# Altium PCB TX_custom.PcbDoc (part 2 of 2)
Units mil, origin at the board's own origin, x right, y up, seen from the top; angles counter-clockwise.
Board outline 2165.35 x 2559.06 mil, 4 copper layers (Top Layer, Signal Layer 1, Internal Plane 1, Bottom Layer), stack 60.752 mil thick; 202 components, 136 nets, 640 pads, 248 vias.
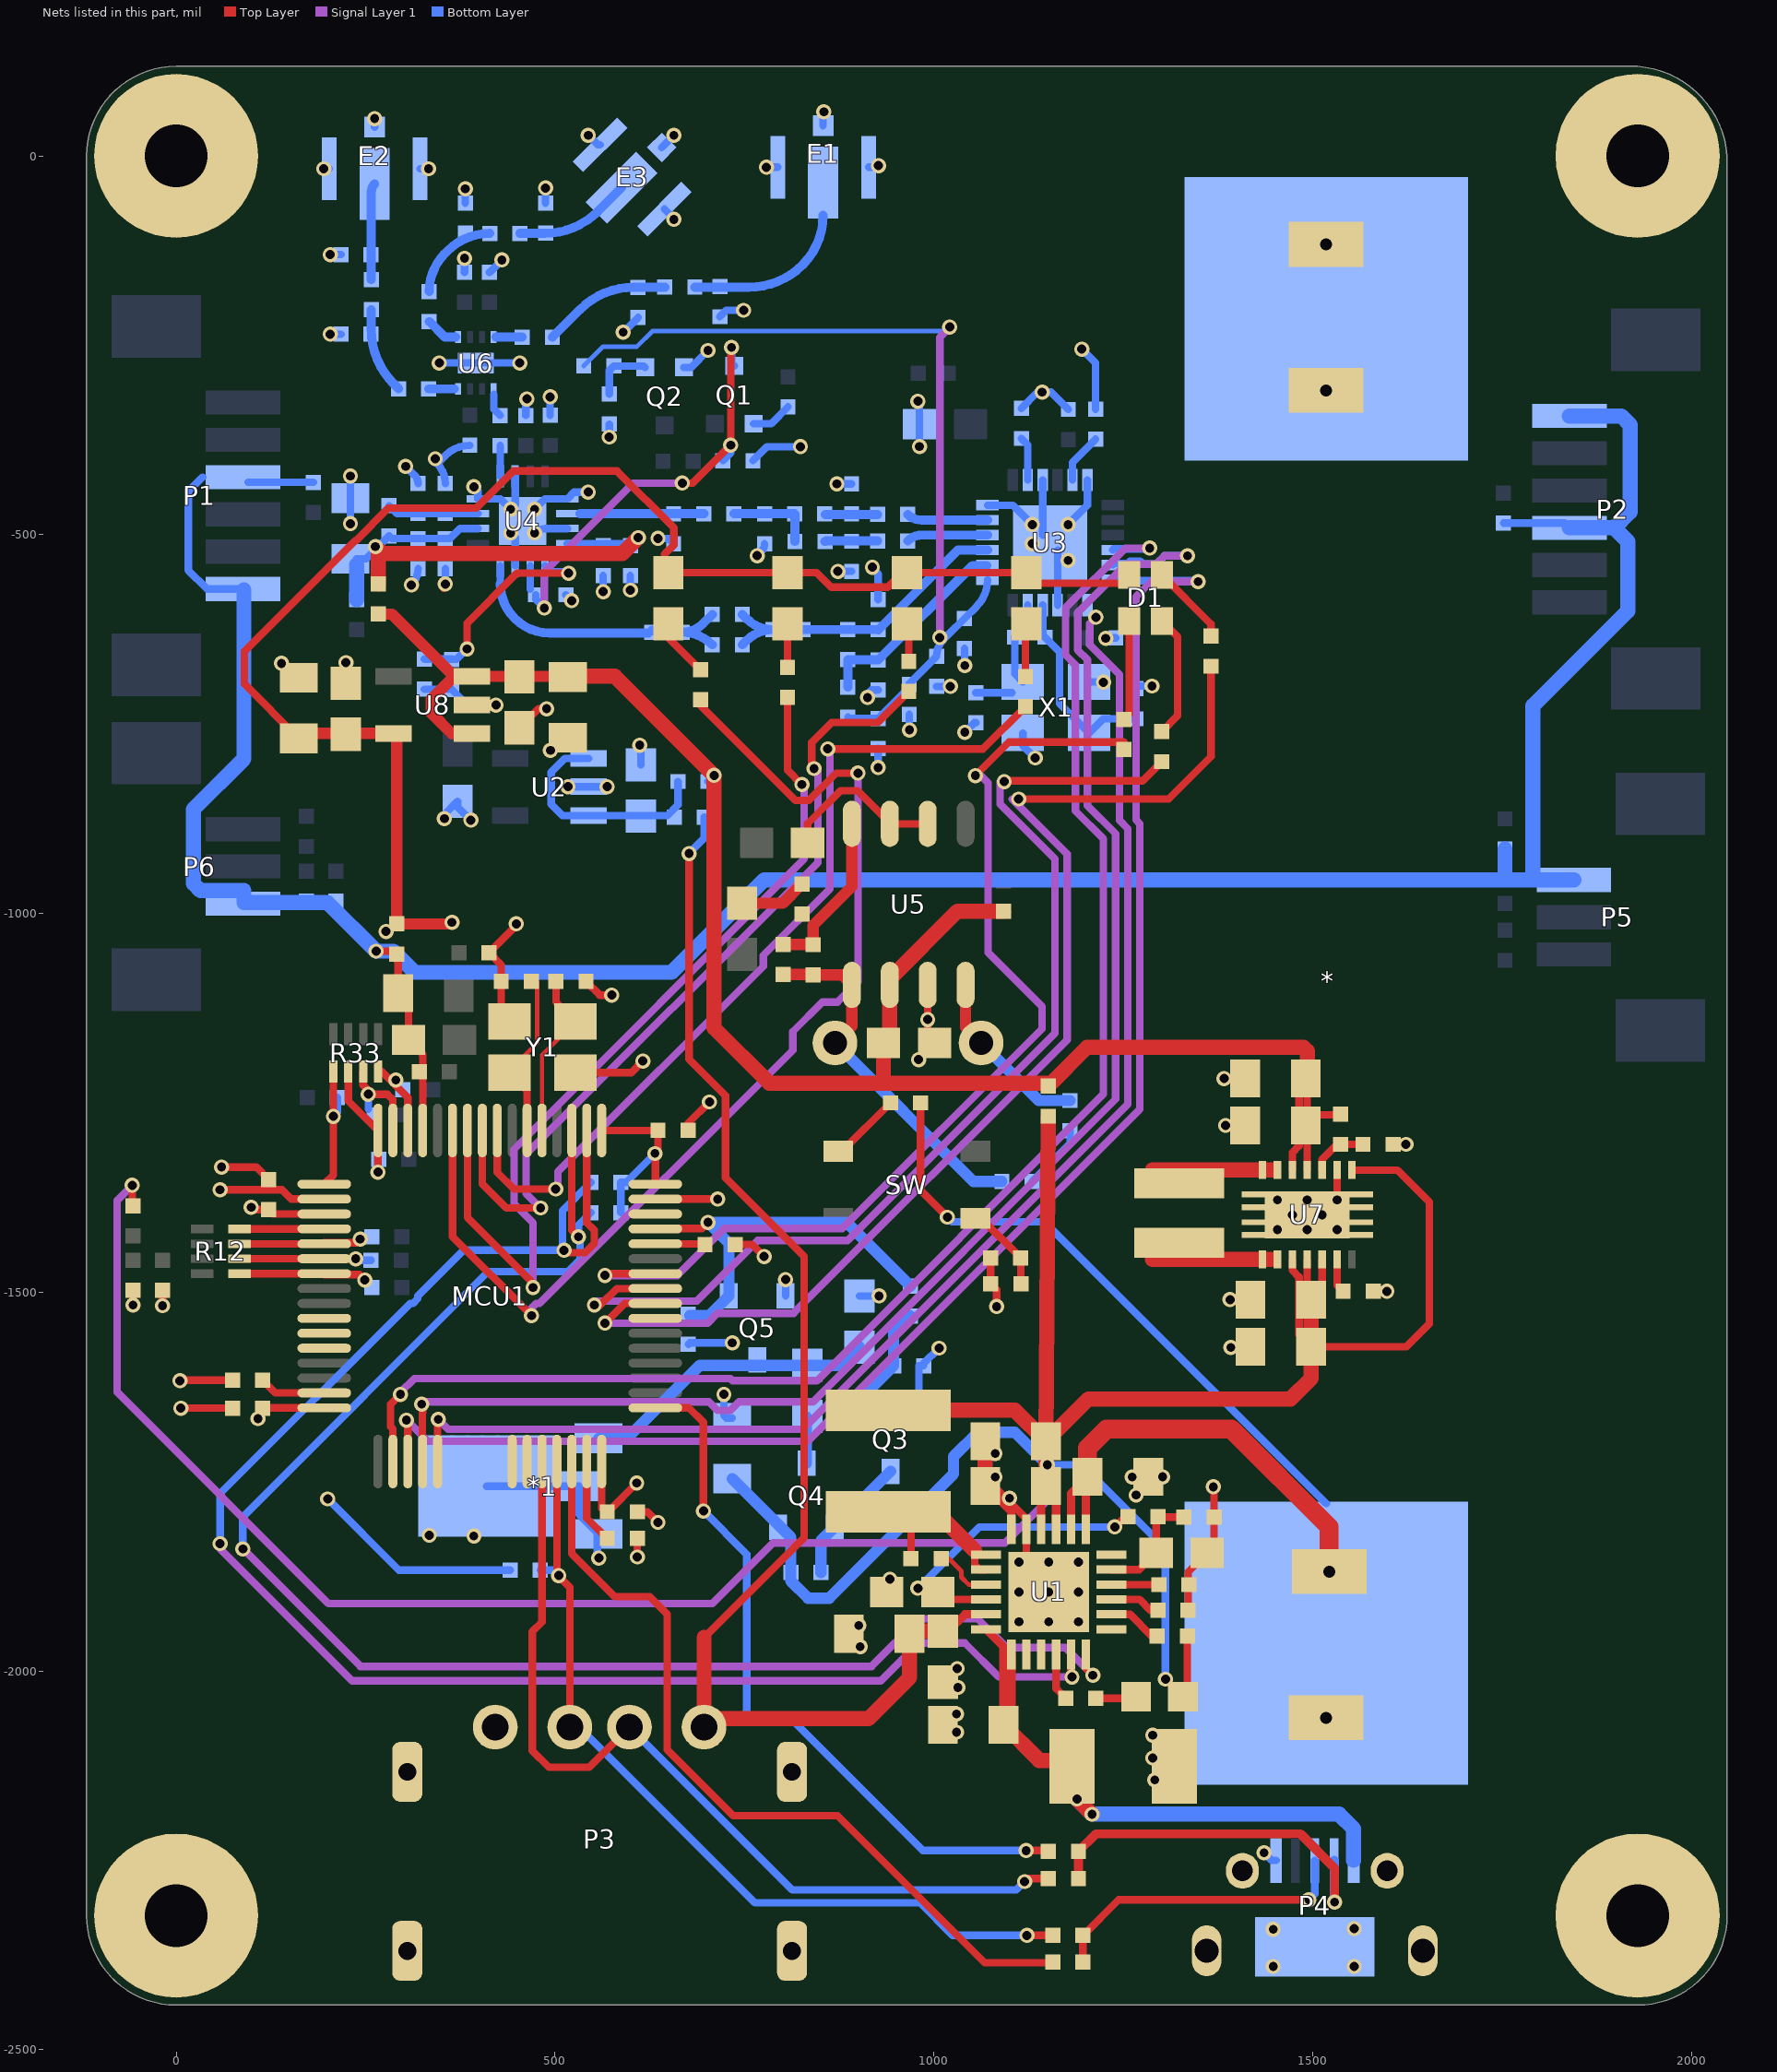
[diagram p4: the nets of this part, all layers, seen from the top]

## Via types
v1: diameter 20, hole 12, Top Layer to Bottom Layer, 207 vias
v2: diameter 19.68, hole 11.81, Top Layer to Bottom Layer, 28 vias
v3: diameter 20/20/20 (per signal layer), hole 12, Top Layer to Bottom Layer, 13 vias

## Nets (pads, with @x,y where several pads share a name; then routed paths per layer and width w, separated by ;. In a path a pad name is that pad's centre, name@x,y a point inside that pad or via, vN(x,y) a via of type N, cw(c..) or ccw(c..) an arc to the next point about the centre after c; other vN are vias at no path point) (continued)
GND: *1.0 *1.2 *.2 C1.2 C2.2 C3.1 C4.2 C6.2 C7.1 C8.2 C9.2 C12.1 C13.2 C14.2 C15.2 C16.1 C17.1 C18.2 C19.2 C20.2 C21.2 C22.1 C23.1 C24.1 C25.1 C26.1 C27.1 C28.1 C29.1 C30.1 C31.2 C32.1 C33.2 C34.1 C35.2 C36.2 C37.2 C38.1 C39.1 C41.2 C42.1 C43.2 C44.1 C47.2 C49.1 C52.2 C53.1 C61.1 C62.2 C63.2 C64.2 C65.2 C66.2 C67.1 C68.1 C69.1 C70.1 C75.2 C78.2 C81.2 C82.2 C84.2 C86.2 C87.2 C88.2 C89.2 C92.2 E1.2 E2.2 E3.2 L3.1 MCU1.18 MCU1.63 P3.0 P3.4 P4.5 pad.0 pad.1 pad.2 pad.3 Q2.2 Q3.2 Q5.2 R1.2 R2.2 R6.1 R7.2 R8.2 R10.1 R11.1 R16.1 R28.1 R29.1 R32.2 R34.2 R42.1 R44.1 R46.1 R54.2 R55.2 R56.1 U1.0 U1.17 U1.18 U2.2 U3.0 U3.9 U3.18 U3.21 U3.24 U4.0 U4.1 U4.3 U4.7 U4.12 U4.14 U5.7 U6.0 U7.0 U7.2 U8.2 X1.2 X1.4 Y1.2 Y1.4 | length 4649.7
  Top Layer w10: v1(-57,-1516.83) C61.1@-57,-1497.69 ; v1(-18,-1517.83) R46.1@-18,-1497.69 ; v1(5,-1616.83) 5.83,-1616 R28.1@74.31,-1616 ; v1(6.17,-1653) C67.1@74.31,-1653 ; v1(58,-1364.83) 140,-1364.83 152.21,-1377.05 MCU1.18@195.5,-1377.05 ; v1(60,-1334.83) 105.68,-1334.83 C69.1@122,-1351.15 ; v1(139,-669.83) 158.17,-689 C84.2@162,-689 ; C65.2@224,-696 v1(224,-668.83) ; v1@228,-417.83 cw(c223.17,-422.66) v1(230,-422.66) ; v1(230,-485.42) ccw(c233.41,-485.42) v1@231,-487.83 ; v1@346,-272.83 ccw(c347.31,-271.52) v1(347.31,-273.38) ; v1@353,-570.83 ccw(c347.33,-565.16) v1(355.35,-565.16) ; U8.2@390.19,-725 v1(422.17,-725) ; Y1.4@429,-1132.14 C63.2@429,-1089.83 429,-1067.83 R34.2@413,-1051.83 449,-1015.83 v1(449,-1013.83) ; C82.2@453,-755 478.17,-729.83 v1(489,-729.83) ; v1(453.48,-273.38) cw(c453.48,-278.35) v1@457,-274.83 ; v1(494,-784.83) 510.83,-768 C81.2@517,-768 ; Y1.2@527,-1210.3 600.54,-1210.3 v1(616,-1194.83) ; C62.2@541,-1089.83 559,-1107.83 v1(575,-1107.83) ; v1(608.68,-1849.52) R29.1@608.68,-1824.83 ; C68.1@608.68,-1789.83 622,-1789.83 v1(636,-1803.83) ; MCU1.63@632.5,-1377.05 v1(714.79,-1377.05) ; C70.1@675.68,-1286 675.68,-1277.15 v1(704,-1248.83) ; R16.1@737.68,-1437 760.17,-1437 v1(776,-1452.83) ; v1@870,-549.83 cw(c873.4,-553.24) v1(873.4,-548.43) ; v1@870,-433.83 cw(c872.13,-435.96) v1(872.13,-432.95) ; v1@910.49,-712.83 v1(912.62,-714.97) ; v1(980,-1193) 980,-1192 C75.2@1001,-1171 ; C75.2@992,-1162 v1(992,-1140) U5.7@992,-1094.3 ; v1(1021.9,-700.38) cw(c1021.9,-701.94) v1@1023,-700.83 ; C35.2@1075,-1454.67 1075,-1488.52 R56.1@1075.31,-1488.83 1083,-1496.52 v1(1083,-1519) ; U1.18@1102.45,-1813.05 1102.45,-1790.29 C2.2@1068,-1755.83 1079,-1755.83 1122.14,-1798.97 U1.17@1122.14,-1813.05 U1.0@1122.14,-1866.19 ; v1(1224,-694.83) v1@1225,-695.83 ; C15.2@1283,-1743.83 v1(1302,-1743.83) ; R6.1@1335.68,-1920 1335.68,-1869.32 R8.2@1361,-1844 1370,-1835 R7.2@1370,-1797 1370,-1757.83 v1(1369,-1756.83) ; v1(1383.17,-1217.83) C89.2@1411,-1217.83 ; v1(1385.17,-1279.83) C86.2@1411,-1279.83 ; v1(1391.17,-1509.83) C88.2@1418,-1509.83 ; v1(1392.17,-1572.83) 1393.17,-1571.83 C87.2@1418,-1571.83 ; v1(1532.37,-1378.15) U7.2@1532.37,-1338.78 ; R55.2@1580,-1498.83 v1(1598.17,-1498.83) ; R54.2@1606.17,-1304.83 v1(1623.17,-1304.83)
  Top Layer w20: C2.2@1068,-1755.83 C4.2@1068,-1696.83
  Bottom Layer w10: v1(194.83,-17) E2.2@202,-17 ; v1(203.46,-235.38) C33.2@217.62,-235.38 ; v1(203.46,-130.38) C64.2@217.62,-130.38 ; v1(230,-485.42) C23.1@230,-451.83 v1(230,-422.66) ; E2.2@262,38 v1(262,49.17) ; v1(303,-409.83) 314.86,-421.7 cw(c304.04,-432.53) C24.1@319.35,-432.53 ; v1(310.45,-566.39) ccw(c288.96,-544.9) C26.1@319.35,-544.9 ; E2.2@322,-17 v1(333.17,-17) ; C30.1@327.62,-704.06 363.31,-704.06 R32.2@363.62,-704.38 384.24,-725 v1(422.17,-725) ; v1(342,-399.83) 342,-403.83 v1@344.5,-406.34 ; v1(347.31,-273.38) U6.0@395.62,-273.38 v1(453.48,-273.38) ; v1(354,-874.83) 354,-869.38 C34.1@371.46,-851.92 371.46,-859.29 v1(389,-876.83) ; v1(355.35,-565.16) C27.1@355.35,-544.9 ; C25.1@355.35,-432.53 ccw(c318.31,-432.53) v1@344.5,-406.34 ; C32.1@380.62,-153.69 v1(380.62,-135.21) ; C66.2@381.62,-62.38 v1(381.62,-43.46) ; C38.1@387.62,-382.06 ccw(c387.62,-427.57) 355.45,-395.39 v1@344.5,-406.34 ; v1(393,-436.83) 398.31,-442.15 U4.12@398.31,-452.6 427.84,-452.6 v2(441.62,-466.38) 447.53,-460.47 U4.14@447.53,-423.07 ; *1.0@409.89,-1756 *1.0@531.94,-1756 531.94,-1793.4 *1.2@557.53,-1818.99 556,-1820.52 556,-1848.83 v1(558,-1850.83) ; C44.1@413.62,-153.69 v1(430,-137.32) ; v2(441.62,-497.87) 447.53,-503.78 U4.7@447.53,-541.18 ; C22.1@461.65,-342.77 461.65,-322.18 v1(463,-320.83) ; v2(473.12,-497.87) cw(c487.38,-512.13) 487.38,-491.97 U4.3@516.43,-491.97 ; v2(473.12,-466.38) 486.9,-452.6 U4.1@516.43,-452.6 525.19,-443.83 v1(544,-443.83) ; C92.2@487.62,-62.38 v1(487.62,-42.46) ; C52.2@493.65,-342.46 v1(493.65,-318.18) ; C53.1@514.31,-579.38 v1(522,-587.07) ; v1(517.1,-832.74) U2.2@544.31,-832.74 v1(568.9,-832.74) ; v1(544,27.17) 556.57,14.59 E3.2@559.57,14.59 ; v1(563.59,-575.24) C28.1@563.59,-553.98 ; v1(571.62,-371.21) R10.1@571.62,-354.06 ; v1(590,-232.83) 590.17,-232.83 C43.2@609.62,-213.38 ; v1(599.59,-573.24) C29.1@599.59,-553.98 ; v1(612,-777.83) 613.46,-779.29 C42.1@613.46,-803.99 ; v1(636,-505) 649.56,-505 C7.1@656.62,-512.06 ; E3.2@640.89,11.06 v1(657,27.17) ; E3.2@644.43,-70.26 657,-82.83 v1(657,-83.83) ; Q2.2@670.21,-279.19 679.65,-279.19 v1(702,-256.83) ; R44.1@676,-1568.69 677.85,-1566.83 v1(734,-1566.83) ; C41.2@717.62,-212.38 726.17,-203.83 v1(749,-203.83) ; v1(723,-1634.83) 723,-1662.83 726.17,-1666 C78.2@734,-1666 ; R11.1@761.31,-402.38 779.85,-383.83 v1(824,-383.83) ; v1(767,-527.83) 772.27,-522.56 ccw(c761.78,-512.06) C49.1@776.62,-512.06 ; v1(779.17,-15) E1.2@794,-15 ; Q5.2@804.4,-1504.68 v1(804.4,-1483.24) ; E1.2@854,40 854,57.17 v1(855,58.17) ; v1(872.13,-432.95) C47.2@891.54,-432.95 ; v1(873.4,-548.43) L3.1@891.54,-548.43 ; C37.2@902,-1505 v1(927.83,-1505) ; v1(912.62,-714.97) 912.62,-710.21 917.77,-705.06 C16.1@926.62,-705.06 ; E1.2@914,-15 924.83,-15 v1(927,-12.83) ; v1(919,-543) 919,-544.59 926.62,-552.21 C12.1@926.62,-585.69 ; v1(926.62,-807.46) C21.2@926.62,-782.38 ; C19.2@967.62,-737.38 967.62,-757.46 v1(968,-757.83) ; v1(979,-323.83) 981.16,-325.99 C39.1@981.16,-354.38 v1(981.16,-383.68) ; Q3.2@980.4,-1651.68 R42.1@980.4,-1597 ; R42.1@986.68,-1597 986.68,-1594.15 v1(1007,-1573.83) ; C18.2@1003.62,-700.38 v1(1021.9,-700.38) ; C20.2@1040.62,-650.38 1040.62,-672.46 v1(1041,-672.83) ; v1(1041,-760.83) 1053.46,-748.38 C9.2@1055.62,-748.38 ; U3.18@1070.94,-461.18 1104.41,-461.17 v3(1130,-486.77) ; R1.2@1115.62,-333.38 1137.17,-311.83 v1(1143,-311.83) 1154.76,-311.83 C3.1@1177.62,-334.69 ; X1.2@1117.62,-761.84 1117.62,-778.46 v1(1134,-794.83) ; U3.0@1143.78,-500.54 U3.21@1143.78,-427.72 ; U3.9@1163.46,-593.07 U3.0@1163.46,-520.22 ; v3(1177.24,-486.77) 1202.83,-461.17 U3.24@1202.83,-427.72 ; v1(1195.35,-255.04) 1213.62,-273.31 C36.2@1213.62,-334.38 ; X1.4@1204.93,-694.38 1223.54,-694.38 v1(1224,-694.83) ; v1(1227,-636.83) 1226.54,-636.38 C17.1@1240.31,-636.38 ; C8.2@1266.62,-703.38 1270.17,-699.83 v1(1288,-699.83) ; v1(1436,-2240) 1446,-2250 P4.5@1451.82,-2250
  other v1: 1291.68,-2143.83 1453.63,-1417.52 1493,-1417.52 1532.37,-1417.52 1473.31,-1397.83 1512.68,-1397.83 1453.63,-1378.15 1493,-1378.15
  other v2: 1448,-2390 1555,-2390 1448,-2341 1555,-2340 1289,-2114.83 1289,-2084.83 1030,-2080.83 1030,-2056.83 1032,-2021.83 1031,-1996.83 903,-1967.83 901,-1939.83 942,-1878.83 393,-1821.83 334,-1820.83 1100,-1771.83 1267,-1767.83 1081,-1743.83 1262,-1743.83 1081,-1712.83
  other v3: 1112.3,-1935.09 1151.67,-1935.09 1191.04,-1935.09 1112.3,-1895.72 1151.67,-1895.72 1191.04,-1895.72 1112.3,-1856.35 1151.67,-1856.35 1191.04,-1856.35 1177.24,-534.02 1130,-512
IRQ: MCU1.37 U3.7 | length 1819.5
  Top Layer w10: MCU1.37@345.1,-1723.5 v1@345.1,-1668.73
  Signal Layer 1 w10: v1(346,-1667.83) 359,-1680.83 826.95,-1680.83 1256,-1251.79 1256,-888.23 1245,-877.23 1245,-684.53 1206,-645.53 1206,-617 v1(1214,-609)
  Bottom Layer w10: v1(1214,-609) v1@1218.78,-609
KEY1: MCU1.26
KEY2: MCU1.27
KEY3: MCU1.28
MISO: MCU1.35 U3.6 | length 2099.2
  Top Layer w10: v1(304,-1668.83) 305.73,-1670.57 MCU1.35@305.73,-1723.5
  Signal Layer 1 w10: v1(304,-1668.83) 332,-1696.83 833.58,-1696.83 1272,-1258.42 1272,-881.61 1267,-876.61 1267,-581.83 1286.83,-562 v1(1349,-562)
  Bottom Layer w10: U3.6@1236.3,-559.61 1237.54,-560.83 1347.83,-560.83 v1(1349,-562)
MOSI: MCU1.36 U3.5 | length 2114.2
  Top Layer w10: v1(324,-1647.83) 325.42,-1649.25 325.42,-1658.72 325,-1659.14 325,-1723.09 MCU1.36@325.42,-1723.5
  Signal Layer 1 w10: v1(324,-1647.83) 327,-1644.83 703.3,-1644.83 714.3,-1655.83 731.7,-1655.83 742.7,-1644.83 840.33,-1644.83 1240,-1245.16 1240,-894.86 1203,-857.86 1203,-665.16 1190,-652.16 1190,-603.3 1254.47,-538.83 1293.7,-538.83 1304.53,-528 v1(1335,-528)
  Bottom Layer w10: U3.5@1236.3,-539.91 1238.08,-538.13 1255.62,-538.13 1258.91,-534.83 1272.3,-534.83 1276.3,-538.83 1293.7,-538.83 1304.53,-528 v1(1335,-528)
Net*1_1: *1.1 C37.1 Q5.3 R38.1 | length 394.4
  Bottom Layer w15: *1.1@557.53,-1693.01 594.83,-1693.01 691.3,-1596.54 R38.1@833,-1596.54 877.93,-1596.54 C37.1@902,-1572.46
NetC5_1: C5.1 U1.21 | length 78.1
  Top Layer w6: C5.1@1009.68,-1851.83 1020,-1851.83 1036.46,-1868.3 1036.46,-1876.3 1046.05,-1885.88 U1.21@1068.99,-1885.88
NetC5_2: C5.2 L1.2 U1.19 U1.20 | length 140.9
  Top Layer w10: C5.2@970,-1851.83 970,-1819.76 ; 1054,-1840.83 1054,-1859.83 1060.36,-1866.2 U1.20@1068.99,-1866.2
  Top Layer w20: L1.2@1002.93,-1789.76 1054,-1840.83
NetC7_2: C7.2 L2.2 U4.2 | length 163.7
  Bottom Layer w12: 533,-472.28 696.53,-472.28 L2.2@696.62,-472.38
NetC8_1: C8.1 R23.2 U3.10 X1.1 | length 263.6
  Bottom Layer w10: U3.10@1143.78,-593.07 1143.78,-632.54 R23.2@1146.62,-635.38 1165.93,-654.69 1165.93,-722.93 X1.1@1204.93,-761.84 X1.1@1204.93,-761.84 1223.71,-743.06 C8.1@1266.62,-743.06
NetC9_1: C9.1 R23.1 U3.11 X1.3 | length 160.5
  Bottom Layer w10: C9.1@1055.62,-708.69 X1.3@1103.31,-708.69 ; X1.3@1117.62,-694.38 1106.94,-683.69 R23.1@1106.94,-635.38 1124.09,-618.22 U3.11@1124.09,-593.07
NetC10_1: C10.1 U3.16 | length 107.3
  Bottom Layer w12: C10.1@965.72,-508.35 cw(c984.57,-527.2) 984.57,-500.54 U3.16@1070.94,-500.55
NetC10_2: C10.2 C11.2 L3.2 | length 69.8
  Bottom Layer w12: C11.2@856.43,-509.06 cw(c858.14,-510.77) 858.14,-508.35 C10.2@926.03,-508.35
NetC11_1: C11.1 C49.2 L2.1 L9.2 | length 116.7
  Bottom Layer w12: L2.1@736.31,-472.38 C49.2@776.62,-472.38 816.17,-472.38 cw(c814.78,-473.77) 816.74,-473.77 C11.1@816.74,-509.06
NetC12_2: C12.2 L5.2 L6.1 U3.15 | length 287.2
  Bottom Layer w12: L6.1@827.31,-625.38 L5.2@886.62,-625.38 C12.2@926.62,-625.38 ; C12.2@926.72,-625.4 1031.87,-520.24 U3.15@1071.04,-520.24
NetC16_2: C16.2 L5.1 L7.2 U3.14 | length 271.1
  Bottom Layer w12: L7.2@886.62,-701.38 L5.1@886.62,-665.06 C16.2@926.31,-665.06 ; C16.2@926.72,-665.31 1051.3,-540.72 U3.14@1070.24,-540.72
NetC18_1: C18.1 C19.1 C20.1 C21.1 L7.1 R9.1 U3.13 | length 1199
  Signal Layer 1 w10: v1(1008,-635.83) 1008,-239.91 1020.24,-227.67 cw(c1022.83,-227.67) v1(1021,-225.83)
  Bottom Layer w6: R9.1@537.94,-277.38 563.48,-251.83 608.17,-251.83 628.62,-231.38 1015.46,-231.38 v1(1021,-225.83)
  Bottom Layer w10: L7.1@886.62,-741.06 ccw(c890.56,-737.13) 890.56,-742.69 C21.1@926.62,-742.69 964.79,-704.52 ccw(c957.97,-697.69) C19.1@967.62,-697.69 cw(c970.04,-697.69) 968.33,-695.99 C18.1@1003.62,-660.69 cw(c1035.01,-660.69) 1012.81,-638.5 1020.24,-631.07 C20.1@1040.62,-610.69 1056.25,-595.06 ccw(c1020.78,-559.59) U3.13@1070.94,-559.61
NetC30_2: C30.2 R32.1 U4.5 | length 292.7
  Top Layer w10: v1(384,-650.83) 384,-616.83 450,-550.83 v1(518,-550.83)
  Bottom Layer w10: C30.2@327.62,-664.38 363.31,-664.38 R32.1@363.62,-664.69 370.14,-664.69 v1(384,-650.83) ; U4.5@486.9,-541.18 494.55,-548.83 516,-548.83 v1(518,-550.83)
NetC33_1: C33.1 C90.2 L8.1 | length 114.9
  Bottom Layer w12: L8.1@257.62,-203.06 257.62,-229.96 ccw(c357.62,-229.96) 286.91,-300.67 C90.2@293.62,-307.38
NetC35_1: C35.1 R56.2 SW.2 | length 115.4
  Top Layer w10: SW.2@1055.12,-1402.56 1062.57,-1402.56 C35.1@1114.68,-1454.67 1115,-1454.98 R56.2@1115,-1488.83
NetC36_1: C36.1 U3.23 | length 66.3
  Bottom Layer w10: U3.23@1183.15,-427.72 1183.15,-404.54 C36.1@1213.62,-374.06
NetC40_1: C40.1 U6.1 | length 31.3
  Bottom Layer w10: U6.1@419.24,-314.83 419.24,-334.32 C40.1@427.62,-342.69
NetC40_2: C40.2 U4.13 | length 40.5
  Bottom Layer w10: U4.13@427.84,-423.07 C40.2@427.84,-382.6
NetC41_1: C41.1 E1.1 L12.2 | length 223
  Bottom Layer w12: L12.2@684.62,-173.38 756.04,-173.38 ccw(c756.04,-73.38) 826.75,-144.09 ccw(c760.95,-78.29) E1.1@854,-78.29
NetC42_2: C42.2 R59.1 R60.1 U2.1 U2.3 | length 309.4
  Bottom Layer w10: U2.1@544.31,-795.34 513.2,-795.34 495,-813.53 495,-855.83 509.9,-870.74 U2.3@544.31,-870.74 648.41,-870.74 662.31,-856.83 R60.1@662.31,-825.83
NetC43_1: C43.1 C85.2 L12.1 | length 171.4
  Bottom Layer w12: C85.2@496.62,-239.38 533.33,-202.67 cw(c604.04,-273.38) 604.04,-173.38 L12.1@644.94,-173.38
NetC47_1: C47.1 C48.2 L9.1 | length 69.2
  Bottom Layer w12: L9.1@856.82,-473.35 C48.2@926.03,-473.35
NetC48_1: C48.1 U3.17 | length 107.2
  Bottom Layer w12: C48.1@965.72,-473.35 ccw(c983.83,-455.23) 983.83,-480.85 U3.17@1070.94,-480.87
NetC50_1: C50.1 C51.2 L4.2 | length 92.3
  Bottom Layer w12: L4.2@707.62,-645.38 ccw(c667.68,-685.31) C50.1@667.68,-628.83 ccw(c667.68,-589.05) 695.82,-617.18 C51.2@707.62,-605.38
NetC50_2: C50.2 U4.8 | length 263
  Bottom Layer w10: 427.84,-564.68 U4.8@427.84,-541.18 ; C50.2@623.17,-629.83 ccw(c623.17,-625.38) C50.2@627.62,-625.38
  Bottom Layer w12: 427.84,-564.68 ccw(c493,-564.68) 493,-629.83 C50.2@623.17,-629.83
NetC51_1: C51.1 L4.1 L6.2 | length 93
  Bottom Layer w12: L4.1@747.31,-645.38 L4.1@752.94,-639.74 ; C51.1@747.31,-605.38 752.94,-611.01 ccw(c787.62,-576.33) L6.2@787.62,-625.38 ccw(c787.62,-674.42) L4.1@752.94,-639.74
NetC54_1: C54.1 MCU1.14 R33.8 | length 102.5
  Top Layer w10: R33.8@266.53,-1208.61 271.4,-1208.61 v1@286.81,-1224.02 ; v1(290,-1219.83) 286.81,-1223.02 v1@286.81,-1224.02 ; MCU1.14@305.73,-1286.5 305.73,-1242.94 v1@286.81,-1224.02
NetC55_1: C55.1 MCU1.15 R33.7 | length 131
  Top Layer w10: R33.7@246.84,-1208.61 246.84,-1226.68 v1@259,-1238.83 ; v1(253.69,-1238.67) 253.85,-1238.83 v1@259,-1238.83 ; MCU1.15@286.05,-1286.5 286.05,-1245.88 279,-1238.83 v1@259,-1238.83
  Signal Layer 1 w10: v1@253.5,-1238.48 v1(253.69,-1238.67)
  Bottom Layer w10: C55.1@253.69,-1258.2 v1(253.69,-1238.67)
NetC56_1: C56.1 MCU1.16 R33.6 | length 149.1
  Top Layer w10: R33.6@227.16,-1208.61 227.16,-1247.29 MCU1.16@266.36,-1286.5 v1(266.36,-1341.47)
NetC57_1: C57.1 MCU1.17 R33.5 | length 180.7
  Top Layer w10: MCU1.17@195.5,-1357.36 207.47,-1345.39 v1(207.47,-1267.83) R33.5@207.47,-1208.61
  Bottom Layer w10: v1(207.47,-1267.83) 212.68,-1262.62 C57.1@212.68,-1243
NetC58_1: C58.1 MCU1.21 R12.7 | length 162.7
  Top Layer w10: R12.7@83.66,-1436.1 MCU1.21@195.5,-1436.1 195.5,-1434.83 238,-1434.83 v1(243,-1429.83)
NetC59_1: C59.1 MCU1.22 R12.6 | length 174.5
  Top Layer w10: R12.6@83.66,-1455.79 MCU1.22@195.5,-1455.79 236.95,-1455.79 v1(237,-1455.83)
  Bottom Layer w10: v1(237,-1455.83) 239,-1457.83 C59.1@257.31,-1457.83
NetC60_1: C60.1 MCU1.23 R12.5 | length 171
  Top Layer w10: R12.5@83.66,-1475.47 MCU1.23@195.5,-1475.47 195.5,-1476.83 242,-1476.83 v1(249,-1483.83)
  Signal Layer 1 w10: v1(249,-1483.83) v1@250,-1482.83
NetC62_1: C62.1 MCU1.5 Y1.3 | length 225.6
  Top Layer w6: MCU1.5@482.9,-1286.5 482.9,-1186.94 Y1.3@527,-1142.83
  Top Layer w10: C62.1@501.31,-1089.83 501.31,-1117.15 Y1.3@527,-1142.83
NetC63_1: C63.1 MCU1.6 Y1.1 | length 229.7
  Top Layer w6: Y1.1@439.69,-1210.3 439.69,-1207.56 476.69,-1170.56 476.69,-1089.83 C63.1@468.68,-1089.83
  Top Layer w10: Y1.1@439.69,-1210.3 463.21,-1233.82 MCU1.6@463.21,-1286.5
NetC64_1: C64.1 E2.1 L8.2 | length 127.5
  Bottom Layer w12: L8.2@257.62,-163.38 257.62,-47.57 cw(c272.57,-47.57) E2.1@262,-37
NetC66_1: C66.1 C91.2 L10.1 | length 122.4
  Bottom Layer w12: C91.2@334,-179 cw(c404.77,-179) 354.73,-128.96 358.23,-125.45 cw(c413.94,-181.15) L10.1@413.94,-102.38
NetC72_1: C72.1 U5.2 U5.3 | length 220.7
  Top Layer w10: C72.1@833.46,-907 833.46,-881.54 877,-838 899.26,-838 942,-880.74 U5.3@942,-881.7 U5.2@992,-881.7
NetC73_1: C73.1 R37.1 | length 89.4
  Top Layer w15: C73.1@747,-986.54 800.78,-986.54 R37.1@826,-961.32
NetC74_1: C74.1 R53.1 | length 88.2
  Bottom Layer w10: C74.1@1129.68,-1354 1180,-1303.69 R53.1@1180,-1286.69
NetC74_2: C74.2 C76.1 R27.2 RX2.2 U5.5 | length 478.9
  Top Layer w15: C76.1@801,-1080.69 840.68,-1080.69 R27.2@841,-1081 878.7,-1081 U5.5@892,-1094.3 892,-1148.54 RX2.2@869.54,-1171
  Bottom Layer w15: RX2.2@869.54,-1171 1052.54,-1354 C74.2@1090,-1354
NetC76_2: C76.2 R27.1 R37.2 U5.4 | length 220.2
  Top Layer w15: C76.2@801,-1041 840.68,-1041 840.68,-1015.69 892,-964.37 U5.4@892,-881.7
NetC85_1: C85.1 U6.8 | length 34.7
  Bottom Layer w12: U6.8@422,-239.13 C85.1@456.68,-239.13
NetC90_1: C90.1 U6.4 | length 33.4
  Bottom Layer w12: C90.1@333.56,-307.63 367,-307.63
NetC91_1: C91.1 U6.5 | length 43.5
  Bottom Layer w12: C91.1@334,-218.69 354.44,-239.13 U6.5@369,-239.13
NetC92_1: C92.1 E3.1 L10.2 | length 155
  Bottom Layer w12: L10.2@453.62,-102.38 486.04,-102.38 ccw(c486.04,-2.38) 556.75,-73.09 E3.1@587.86,-41.98
NetD1_2: D1.2 R17.2 | length 107.6
  Top Layer w10: D1.2@1301.18,-553.27 1366,-618.09 R17.2@1366,-634
NetD1_3: D1.3 R19.2 | length 163.4
  Top Layer w10: R19.2@1301,-760 1322,-739 1322,-634.72 D1.3@1301.18,-613.9
NetD1_4: D1.4 R20.2 | length 132.9
  Top Layer w10: R20.2@1251,-744 1257.87,-737.13 D1.4@1257.87,-613.9
NetD2_2: D2.2 R13.1 | length 68.7
  Top Layer w10: R13.1@1121,-687.32 D2.2@1121,-618.63
NetD3_2: D3.2 R22.1 | length 47.3
  Top Layer w10: R22.1@967,-667.32 D3.2@967,-620.02
NetD4_2: D4.2 R4.2 | length 51
  Top Layer w10: R4.2@1214,-2036 D4.2@1265,-2036
NetD5_2: D5.2 R30.1 | length 57.6
  Top Layer w10: R30.1@807,-675.32 D5.2@807,-617.67
NetD6_2: D6.2 R31.1 | length 60
  Top Layer w10: D6.2@649.61,-635.92 R31.1@692,-678.32
NetL11_1: L11.1 U7.8 U7.9 | length 156.3
  Top Layer w20: 1288.87,-1456.89 U7.8@1433.94,-1456.89 1445.17,-1456.89
NetL11_2: L11.2 U7.6 U7.7 | length 157.3
  Top Layer w20: L11.2@1288.87,-1338.78 U7.7@1433.94,-1338.78 1446.17,-1338.78
NetMCU1_8: MCU1.8 R13.2 | length 1157.8
  Top Layer w10: MCU1.8@423.84,-1286.5 423.84,-1341.68 446,-1363.83 v1(501,-1363.83) ; v1(860,-782.83) 1065.17,-782.83 R13.2@1121,-727
  Signal Layer 1 w10: v1(501,-1363.83) 504,-1360.83 504,-1340.83 775.02,-1069.82 775.02,-1055.47 863,-967.49 863,-785.83 v1(860,-782.83)
NetMCU1_9: MCU1.9 R22.2 | length 1101.7
  Top Layer w10: MCU1.9@404.16,-1286.5 404.16,-1356.99 436,-1388.83 v1(481,-1388.83) ; v1(842,-808.83) 839,-805.83 839,-774.14 865.14,-748 926,-748 R22.2@967,-707
  Signal Layer 1 w10: v1(481,-1388.83) 462,-1369.83 462,-1317.83 847,-932.83 847,-813.83 v1(842,-808.83)
NetMCU1_10: MCU1.10 R30.2 | length 1204.1
  Top Layer w10: MCU1.10@384.47,-1286.5 384.47,-1401.31 471,-1487.83 v1(471,-1493.83) ; R30.2@807,-715 807,-810.83 v1(826,-829.83)
  Signal Layer 1 w10: v1(471,-1493.83) 471,-1408.53 446,-1383.53 446,-1311.21 829,-928.21 829,-832.83 v1(826,-829.83)
  Bottom Layer w10: v1(826,-829.83) v1@826,-825.83
NetMCU1_11: MCU1.11 R31.2 | length 1478.7
  Top Layer w10: MCU1.11@364.79,-1286.5 364.79,-1426.62 v1(469,-1530.83) ; R31.2@692,-718 692,-725.53 817.3,-850.83 835.17,-850.83 871.17,-814.83 v1(900,-814.83)
  Signal Layer 1 w10: v1(469,-1530.83) 469,-1521 475.17,-1514.83 479.7,-1514.83 814,-1180.53 814,-1156 853,-1117 873,-1117 900,-1090 v1(900,-814.83)
NetMCU1_20: MCU1.20 R12.8 | length 111.8
  Top Layer w10: R12.8@83.66,-1416.42 MCU1.20@195.5,-1416.42
NetMCU1_31: MCU1.31 R28.2 | length 88.5
  Top Layer w10: R28.2@114,-1616 130.95,-1632.95 MCU1.31@195.5,-1632.95
NetMCU1_44: MCU1.44 P3.2 R35.1 | length 1192.4
  Top Layer w10: MCU1.44@482.9,-1723.5 482.9,-1935.36 470,-1948.26 470,-2105 492,-2127 545.43,-2127 P3.2@598.37,-2074.06 ; v1(1120,-2278) 1124,-2274 R35.1@1149.31,-2274
  Bottom Layer w10: P3.2@598.37,-2074.06 813.31,-2289 1109,-2289 v1(1120,-2278)
NetMCU1_45: MCU1.45 P3.3 R41.1 R48.1 | length 1133.6
  Top Layer w10: v1@502.58,-1872.42 MCU1.45@502.58,-1723.5 ; v1@504.58,-1874.42 519.63,-1889.46 P3.3@519.63,-2074.06 ; v1(1123,-2349) R41.1@1157.31,-2349
  Bottom Layer w10: R48.1@480.68,-1866.83 497.83,-1866.83 v1(505,-1874) ; P3.3@519.63,-2074.06 532.06,-2074.06 764,-2306 982,-2306 1025,-2349 v1(1123,-2349)
NetMCU1_47: MCU1.47 R29.2 | length 112.9
  Top Layer w10: MCU1.47@541.95,-1723.5 541.95,-1798.34 568.44,-1824.83 R29.2@569,-1824.83
NetMCU1_56: MCU1.56 R17.1 | length 1586.6
  Top Layer w10: v1(566,-1540.83) 591.99,-1514.84 MCU1.56@632.5,-1514.84 ; v1(1112,-849) 1310,-849 1366,-793 R17.1@1366,-673.69
  Signal Layer 1 w10: v1(566,-1540.83) 701.52,-1540.83 714.52,-1527.83 815.17,-1527.83 1176,-1167 1176,-921.37 v1@1103.63,-849
NetMCU1_57: MCU1.57 R19.1 | length 1429
  Top Layer w10: v1(552,-1516.83) 560,-1516.83 581.68,-1495.16 MCU1.57@632.5,-1495.16 ; v1(1093,-826) 1092,-825 1275.68,-825 R19.1@1301,-799.69
  Signal Layer 1 w10: v1(552,-1516.83) 557,-1511.83 687.3,-1511.83 767.3,-1431.83 886.17,-1431.83 1160,-1158 1160,-928 1087.63,-855.63 v1@1087.63,-826
NetMCU1_58: MCU1.58 R20.1 | length 1376.3
  Top Layer w10: v1(566,-1477.83) 568.36,-1475.47 MCU1.58@632.5,-1475.47 ; v1(1055,-818) 1099.17,-773.83 1251,-773.83 R20.1@1251,-783.69
  Signal Layer 1 w10: v1(566,-1477.83) 661.7,-1477.83 723.7,-1415.83 879.54,-1415.83 1143,-1152.37 1143,-1123 1071.63,-1051.63 1071.63,-827.63 v1@1058.5,-814.5
NetMCU1_60: MCU1.60 R16.2 | length 64.6
  Top Layer w10: MCU1.60@632.5,-1436.1 R16.2@697.1,-1436.1
NetP4_2: P4.2 R18.2 R35.2 | length 502.3
  Top Layer w12: R35.2@1191,-2274 R18.2@1191,-2238 1214,-2215 1484,-2215 1529,-2260 v1(1529,-2305)
  Bottom Layer w12: P4.2@1528.59,-2250 1528.59,-2304.59 v1(1529,-2305)
NetP4_3: P4.3 R39.1 R41.2 | length 407.9
  Top Layer w10: R39.1@1196.68,-2384 1196.68,-2349.32 R41.2@1197,-2349 1244,-2302 v1(1495,-2302)
  Bottom Layer w10: v1(1495,-2302) 1503,-2294 P4.3@1503,-2250
NetQ1_1: Q1.1 R24.2 | length 54.6
  Bottom Layer w10: Q1.1@762.21,-353.57 785.43,-353.57 R24.2@807.62,-331.38
NetQ2_1: Q2.1 R9.2 R10.2 | length 81.6
  Bottom Layer w10: R10.2@571.62,-314.38 571.62,-283.38 R9.2@577.62,-277.38 617.22,-277.38 Q2.1@619.03,-279.19
NetQ3_1: Q3.1 R40.1 R42.2 | length 133.1
  Bottom Layer w15: Q3.1@905.6,-1638.4 R42.2@947,-1597 947,-1553.52 R40.1@969,-1531.52
NetQ3_3: Q3.3 Q4.1 R36.2 | length 171.8
  Bottom Layer w15: R36.2@851,-1870 851,-1828.32 Q3.3@943,-1736.32
NetQ4_D: Q4.3 R38.2 | length 60.7
  Bottom Layer w15: Q4.3@832,-1725.68 R38.2@832,-1665
NetR1_1: R1.1 U3.20 | length 58.1
  Bottom Layer w10: R1.1@1115.62,-373.06 1124.09,-381.54 U3.20@1124.09,-427.72
NetR2_1: R2.1 U1.10 | length 62.8
  Top Layer w10: U1.10@1234.34,-1885.87 R2.1@1297.19,-1885.87
NetR4_1: R4.1 U1.4 | length 62.9
  Top Layer w10: U1.4@1161.51,-1978.39 1161.51,-2023.2 R4.1@1174.31,-2036
NetR5_2: R5.2 R7.1 R8.1 U1.11 | length 151.3
  Top Layer w10: U1.11@1234.34,-1866.19 1271.35,-1866.19 R8.1@1293.54,-1844 1293.54,-1798.46 1295,-1797 R7.1@1330.31,-1797
NetR6_2: R6.2 U1.9 | length 67.6
  Top Layer w10: U1.9@1234.34,-1905.56 1271.72,-1905.56 1286.17,-1920 R6.2@1296,-1920
NetR14_2: R14.2 R54.1 U7.3 | length 73.3
  Top Layer w10: U7.3@1512.68,-1338.78 1512.68,-1324.46 R14.2@1537.31,-1299.83 ; R14.2@1542.31,-1304.83 R54.1@1566.48,-1304.83
NetR15_2: R15.2 SW.1 | length 95.5
  Top Layer w10: SW.1@874.02,-1313.98 879.02,-1313.98 R15.2@943,-1250
NetR49_2: R49.2 U1.8 | length 72.6
  Top Layer w10: U1.8@1234.34,-1925.24 1259.24,-1925.24 1288,-1954 R49.2@1295,-1954
NetR53_2: R53.2 RX2.1 U5.8 | length 205.3
  Top Layer w15: RX2.1@1042,-1150.54 U5.8@1042,-1094.3
  Bottom Layer w15: RX2.1@1062.46,-1171 1138.46,-1247 R53.2@1180,-1247
NetR55_1: R55.1 U7.13 | length 45.2
  Top Layer w10: U7.13@1532.37,-1456.89 1532.37,-1490.89 R55.1@1540.31,-1498.83
NetU1_2: U1.2
NetU1_3: U1.3
NetU1_7: U1.7
NetU1_12: U1.12
PA9: MCU1.42
PA10: MCU1.43
PA13/SWDIO: MCU1.46 R39.2 | length 1084.8
  Top Layer w10: MCU1.46@522.27,-1723.5 522.27,-1845.1 579,-1901.83 625,-1901.83 648,-1924.83 648,-2103.83 735,-2190.83 873,-2190.83 1067.17,-2385 R39.2@1157,-2385
PA14/SWCLK: MCU1.49 R18.1 | length 950.8
  Top Layer w10: MCU1.49@632.5,-1652.64 676.8,-1652.64 696,-1671.83 v1(696,-1788.83) ; v1(1122,-2237) R18.1@1150.31,-2237
  Bottom Layer w10: v1(696,-1788.83) 753,-1845.83 753,-2054.83 766.17,-2068 816.67,-2068 985.67,-2237 v1(1122,-2237)
PA_EN: C53.2 Q1.3 R11.2 U4.6 | length 596.1
  Top Layer w10: v1(668,-432) 681.83,-432 v1(732,-381.83) 732,-253.83 v1(733,-252.83)
  Signal Layer 1 w10: v1(486,-596.83) 486,-549 603,-432 v1(668,-432)
  Bottom Layer w10: C53.2@467.21,-571.97 U4.6@467.21,-541.18 ; C53.2@474.62,-579.38 474.62,-585.46 v1(486,-596.83) ; R11.2@721.62,-402.38 732,-392 v1(732,-381.83) ; v1(733,-252.83) 733,-273.57 Q1.3@736.62,-277.19
PB3: MCU1.55
REGN: C14.1 R5.1 U1.22 | length 363.6
  Top Layer w10: C14.1@1022.03,-1905.57 U1.22@1068.99,-1905.57 ; v1(1239,-1809.83) 1252.83,-1796 R5.1@1256.31,-1796
  Bottom Layer w10: v1(979,-1890.83) 1060,-1809.83 v1(1239,-1809.83)
SCK: MCU1.34 U3.4 | length 2047.4
  Top Layer w10: MCU1.34@286.05,-1723.5 286.05,-1680.58 283,-1677.53 283,-1647.83 v1(296,-1634.83)
  Signal Layer 1 w10: v1(296,-1634.83) 296,-1632.21 314.37,-1613.83 731.7,-1613.83 734.7,-1616.83 845.7,-1616.83 1224,-1238.53 1224,-901.49 1187,-864.49 1187,-671.79 1174,-658.79 1174,-596.67 1252.84,-517.83 v1(1285,-517.83)
  Bottom Layer w10: U3.4@1236.3,-520.24 1237.68,-518.83 1284,-518.83 v1(1285,-517.83)
SCL1: MCU1.2 R47.1 U1.5 | length 2233.4
  Top Layer w10: v1(511.99,-1444.59) 515.23,-1447.83 539.7,-1447.83 552,-1435.53 552,-1418.14 541.95,-1408.09 MCU1.2@541.95,-1286.5 ; U1.5@1181.2,-1978.39 1181.2,-2006.53 v1(1182.51,-2007.85)
  Signal Layer 1 w10: v1(58,-1831.83) 58,-1838.53 232.47,-2013 930,-2013 980,-1963 1041,-1963 1085.85,-2007.85 v1(1182.51,-2007.85)
  Bottom Layer w10: v1(58,-1831.83) 58,-1765.83 309,-1514.83 312.56,-1514.83 319,-1508.39 319,-1504.83 379.24,-1444.59 v1(511.99,-1444.59) 510,-1442.6 510,-1392.32 R47.1@547.31,-1355
SDA1: MCU1.3 R26.1 U1.6 | length 2115.7
  Top Layer w10: MCU1.3@522.27,-1286.5 522.27,-1418.1 v1(531,-1426.83) ; U1.6@1200.88,-1978.39 1200.88,-1996.52 v1(1210,-2005.64)
  Signal Layer 1 w10: v1(88,-1838.83) 243.17,-1994 918,-1994 981,-1931 1058,-1931 1096,-1969 1173.36,-1969 v1(1210,-2005.64)
  Bottom Layer w10: v1(88,-1838.83) 88,-1796.53 411.7,-1472.83 517,-1472.83 532.99,-1456.85 532.99,-1428.82 v1(531,-1426.83) 531,-1411.32 R26.1@547.31,-1395
VBAT: *.1 C15.1 R15.1 U1.13 U1.14 | length 1447.2
  Top Layer w10: R15.1@982.68,-1250 982.68,-1365.69 v1(1018,-1401)
  Top Layer w11: U1.14@1181.19,-1813.05 1181.19,-1765.64 C15.1@1200.88,-1745.96 ; U1.13@1200.88,-1813.05 C15.1@1200.88,-1745.96 ; C15.1@1203,-1743.83 C15.1@1200.88,-1745.96
  Top Layer w25: C15.1@1203,-1743.83 1203,-1705.83 1228,-1680.83 1393,-1680.83 1521.94,-1809.77 *.1@1521.94,-1868.78
  Bottom Layer w10: v1(1018,-1401) 1024,-1407 1146,-1407 *.1@1518,-1779
VBOOST: C6.1 C13.1 P3.1 R59.2 U1.23 | length 1774.2
  Top Layer w10: v1(677,-920.83) 677,-1192.14 725,-1240.14 725,-1348.83 829,-1452.83 829,-1823.74 696.8,-1955.94
  Top Layer w11: C13.1@1019.36,-1947.37 1041.48,-1925.25 U1.23@1068.99,-1925.25
  Top Layer w20: 696.8,-1955.94 696.8,-2062.8 914.04,-2062.8 968,-2008.83 C6.1@968,-1950.83 ; C6.1@971.46,-1947.37 C13.1@1012,-1947.37 C13.1@1019.36,-1947.37
  Bottom Layer w10: v1(677,-920.83) 697,-900.83 R59.2@697,-872.83
VBQ: C2.1 C4.1 C78.1 C87.1 C88.1 D4.1 L1.1 Q4.2 R25.2 R36.1 R49.1 R58.1 U1.15 U1.16 U7.1 U7.10 U7.11 U7.12 | length 4899.6
  Top Layer w10: v1(-58,-1358.83) -58,-1385 R25.2@-57,-1386 ; v1(1305.83,-2010.83) D4.1@1329,-2034 ; D4.1@1334.68,-2028.32 R49.1@1334.68,-1954 ; U7.10@1473.31,-1456.89 1473.31,-1470.98 1482.17,-1479.83 1482.17,-1556 1493,-1566.83 U7.11@1493,-1456.89 ; C87.1@1498,-1571.83 1624,-1571.83 1654,-1541.83 1654,-1380.83 1611.94,-1338.78 U7.1@1552.06,-1338.78 ; C88.1@1498,-1509.83 1508,-1519.83 1512.68,-1519.83 U7.12@1512.68,-1456.89
  Top Layer w11: U1.16@1141.82,-1813.05 C2.1@1141.82,-1762.01 ; U1.15@1161.51,-1813.05 C2.1@1161.51,-1769.34
  Top Layer w20: L1.1@940,-1655.91 L1.1@940,-1655.91 1107,-1655.83 C4.1@1148,-1696.83 ; v1@1148,-1727.83 C4.1@1148,-1696.83 ; R58.1@1151,-1269 C4.1@1148,-1696.83 ; C88.1@1498,-1509.83 C87.1@1498,-1571.83 1498,-1613.83 1471,-1640.83 1204,-1640.83 C4.1@1148,-1696.83
  Signal Layer 1 w10: v1(-58,-1358.83) -78,-1378.83 -78,-1631.83 201,-1910.83 708,-1910.83 788,-1830.83 1094,-1830.83 1150,-1774.83 v1(1150,-1727.83)
  Bottom Layer w10: v1(1150,-1727.83) 1195,-1727.83 1305.83,-1838.67 v1(1305.83,-2010.83)
  Bottom Layer w15: C78.1@734,-1746 811.31,-1823.32 R36.1@811.31,-1870 811.31,-1881.15 834,-1903.83 862,-1903.83 1026,-1739.83 1026,-1716.83 1058,-1684.83 1107,-1684.83 v1(1150,-1727.83)
VBUS: C1.1 C31.1 P4.1 U1.1 U1.24 | length 824.8
  Top Layer w11: U1.24@1068.99,-1944.94 1092,-1967.94 C1.1@1092,-2070.83 ; C1.1@1102.46,-2060.38 U1.1@1102.46,-1978.39
  Top Layer w20: C1.1@1092,-2070.83 1139.17,-2118 C31.1@1182.48,-2118 ; C31.1@1182.48,-2125.83 1182.48,-2162.48 v1(1189,-2169) v2(1209,-2189)
  Bottom Layer w20: v1(1189,-2169) v2(1209,-2189) 1535,-2189 1554.18,-2208.18 P4.1@1554.18,-2250
VCC_3V3: C65.1 C67.2 C68.2 C69.2 C70.2 C84.1 D1.1 D2.1 D3.1 D5.1 D6.1 MCU1.1 MCU1.19 MCU1.32 MCU1.48 MCU1.64 R21.2 R26.2 R47.2 R48.2 U8.5 | length 2772.3
  Top Layer w10: v1(99,-1387.83) 102,-1390.83 C69.2@122,-1390.83 ; C67.2@114.36,-1652.64 MCU1.32@195.5,-1652.64 ; C69.2@127.9,-1396.73 MCU1.19@195.5,-1396.73 ; C84.1@162,-769 90,-697 90,-654 236,-508 237.12,-508 280.12,-465 396,-465 445,-416 582,-416 657,-491 657,-513.7 644.7,-526 ; C68.2@561.64,-1785.64 MCU1.48@561.64,-1723.5 ; MCU1.1@561.64,-1286.5 635.5,-1286.5 C70.2@636,-1286 636,-1312.83 v2(632,-1316.83) ; C68.2@569,-1789.83 570,-1789.83 v2(608,-1751.83) ; MCU1.64@632.5,-1357.36 v2@632.5,-1317.34 ; D6.1@649.61,-550.12 D5.1@807.09,-550.12 845.4,-550.12 864.7,-569.43 939.11,-569.43 954,-554.53 954,-550.12 D3.1@964.57,-550.12 D2.1@1116.4,-550.12 ; D2.1@1122.05,-550.12 1135.93,-564 1247.14,-564 D1.1@1257.87,-553.27
  Top Layer w15: C84.1@168.6,-762.4 U8.5@287,-762.4 ; U8.5@291,-766.4 R21.2@291,-1013.83 362,-1013.83 v1(364,-1011.83)
  Signal Layer 1 w15: v1@277,-1025.83 v1(277,-1023.83)
  Bottom Layer w10: v1(200,-1772.83) 294,-1866.83 R48.2@441,-1866.83 ; R26.2@587,-1395 R47.2@587,-1355 593.83,-1355 v2(632,-1316.83)
  other v2: 108,-1666.83
VDD_3V3A: C45.1 C46.1 C71.2 C77.2 C79.2 C80.2 C83.2 MCU1.13 P1.1 P1.4 P2.1 P2.4 P5.1 P6.1 R21.1 R43.1 R50.1 | length 3819
  Top Layer w10: v1(264,-1049.83) R21.1@287.31,-1049.83 ; C45.1@293,-1105 R21.1@293,-1055.52 ; C45.1@306.54,-1118.54 C46.1@306.54,-1167 325.42,-1185.88 MCU1.13@325.42,-1286.5
  Bottom Layer w10: 34.83,-424 16,-442.83 16,-546.83 40.8,-571.64 P1.1@88,-571.64 ; P1.4@95,-431 C83.2@181,-431 ; C77.2@1752,-484.83 P2.4@1832.83,-484.83
  Bottom Layer w20: P1.1@89.46,-573.1 89.46,-795.86 22.87,-862.45 22.87,-960.57 32.25,-969.95 89.46,-969.95 89.46,-985.83 200,-985.83 v1(264,-1049.83) 286.82,-1049.83 314.82,-1077.83 654,-1077.83 776.05,-955.79 1791,-955.79 ; R43.1@1754,-947.32 C79.2@1754,-914.83 ; P2.4@1839,-491 1898.17,-491 ; P2.1@1839,-343.36 1907.53,-343.36 1919,-354.83 1919,-470.17 1898.17,-491 ; P5.1@1844.91,-955.79 1791,-955.79 ; 1791,-955.79 1791,-725.83 1916,-600.83 1916,-508.83 1898.17,-491
VFEM: C23.2 C26.2 C27.2 C28.2 C29.2 FB1.1 FB6.2 R57.1 U4.4 U4.10 | length 718.7
  Top Layer w20: FB1.1@267,-565.15 267,-519.83 272,-524.83 589.06,-524.83 v1(610,-503.89)
  Bottom Layer w10: C23.2@238,-531.83 250.68,-531.83 R57.1@281,-501.52 ; R57.1@284.69,-505.21 C26.2@319.35,-505.21 C27.2@355.35,-505.21 361.62,-505.21 374.87,-491.97 U4.10@398.31,-491.97 ; U4.4@516.43,-511.65 596.95,-511.65 C29.2@599.59,-514.3 v1(610,-503.89)
  Bottom Layer w20: FB6.2@238,-585.83 C23.2@238,-539.83
  other v1: 263,-515.83
VIB1: MCU1.61 Q5.1 R40.2 R44.2 | length 545.9
  Top Layer w10: MCU1.61@632.5,-1416.42 632.5,-1416 693.83,-1416 v1(702,-1407.83)
  Bottom Layer w15: R44.2@678,-1531 703.28,-1531 Q5.1@729.6,-1504.68 729.6,-1435.43 v1(702,-1407.83) 885,-1407.83 R40.2@969,-1491.83
VIB2: MCU1.62
VLNA: C24.2 C25.2 R57.2 U4.11 | length 121.6
  Bottom Layer w10: R57.2@281,-461.83 291.45,-472.28 U4.11@398.31,-472.28
VSYS: C75.1 C81.1 C82.1 C86.1 C89.1 FB1.2 R14.1 R52.2 R58.2 R60.2 U5.6 U7.4 U7.5 U8.1 U8.3 | length 2450.1
  Top Layer w10: U7.5@1473.31,-1338.78 1473.31,-1315.69 1482.17,-1306.83 C89.1@1482.17,-1226.67 ; U7.4@1493,-1338.78 C89.1@1493,-1219.83 ; C86.1@1494,-1265.83 R14.1@1537.31,-1265.83
  Top Layer w15: FB1.2@267,-604.83 284.67,-604.83 366.83,-687 337,-716.83 337,-735.83 363.57,-762.4 U8.1@390.19,-762.4 ; U8.3@390.19,-687 C81.1@516,-687
  Top Layer w20: C81.1@516,-687 579.17,-687 v1(710,-817.83) 710,-1151 783,-1224 1151,-1224 R58.2@1151,-1228 1202.17,-1176.83 1488,-1176.83 1493,-1181.83 C89.1@1493,-1219.83 ; 933.54,-1223.54 C75.1@933.54,-1171 ; C75.1@942,-1162.54 U5.6@942,-1094.3 942,-1086.27 1031.27,-997 R52.2@1092,-997
  Bottom Layer w10: R60.2@702,-825.83 v1(710,-817.83)
pads on no net: MCU1.7 MCU1.24 MCU1.25 MCU1.29 MCU1.41 MCU1.50 MCU1.51 MCU1.52 MCU1.53 MCU1.54 MCU1.59 P4.4 SW.3 SW.4 U2.4 U3.3 U3.12 U4.9 U6.2 U7.14 U8.4

## Polygon pours and split planes (outlines as drawn)
AGND on Bottom Layer "Bottom Layer-No Net" (solid, remove dead copper, pour order 3): 2023.11,-159.83 1936,-159.83 1933,-159.83 1741,-351.83 1726,-366.83 1726,-1101.83 1893,-1268.83 2023.11,-1268.83
AGND on Bottom Layer "Bottom Layer-No Net" (solid, remove dead copper, pour order 4): -118.11,-1258.83 -31,-1258.83 -28,-1258.83 164,-1066.83 179,-1051.83 179,-316.83 12,-149.83 -118.11,-149.83
VCC_3V3 on Internal Plane 1 (split plane): 666.9,-1296.95 666.9,-1786.74 84.1,-1786.74 84.1,-1186.95 286.11,-984.93 354.89,-984.93
GND on Internal Plane 1 (split plane): 0,98.01 1928.84,98.01 1936.24,97.14 1944.58,95.48 1952.76,93.17 1960.74,90.23 1968.46,86.67 1975.89,82.51 1982.96,77.79 1989.64,72.52 1995.88,66.75 2001.65,60.5 2006.92,53.82 2011.64,46.75 2015.8,39.33 2019.36,31.61 2022.3,23.63 2024.61,15.44 2026.27,7.1 2027.15,-0.29 2027.15,-2322.83 2027.21,-2323.47 2026.86,-2331.39 2025.75,-2339.87 2023.89,-2348.23 2021.32,-2356.39 2018.05,-2364.3 2014.09,-2371.89 2009.5,-2379.1 2004.29,-2385.89 1998.5,-2392.2 1992.19,-2397.99 1985.4,-2403.2 1978.19,-2407.79 1970.59,-2411.75 1962.69,-2415.02 1954.52,-2417.6 1946.17,-2419.45 1937.68,-2420.57 1929.77,-2420.91 1929.13,-2420.85 0,-2420.85 -0.63,-2420.91 -8.55,-2420.57 -17.04,-2419.45 -25.39,-2417.6 -33.55,-2415.02 -41.46,-2411.75 -49.05,-2407.79 -56.27,-2403.2 -63.06,-2397.99 -69.37,-2392.2 -75.15,-2385.89 -80.36,-2379.1 -84.96,-2371.89 -88.91,-2364.3 -92.19,-2356.39 -94.76,-2348.23 -96.61,-2339.87 -97.73,-2331.39 -98.08,-2323.47 -98.01,-2322.83 -98.01,0 -98.08,0.63 -97.73,8.55 -96.61,17.04 -94.76,25.39 -92.19,33.55 -88.91,41.46 -84.96,49.05 -80.36,56.27 -75.15,63.06 -69.37,69.37 -63.06,75.15 -56.27,80.36 -49.05,84.96 -41.46,88.91 -33.55,92.19 -25.39,94.76 -17.04,96.61 -8.55,97.73 -0.63,98.08

## Keep-outs
Keep-Out Layer:
  the board outline again, w10

## Other copper
Internal Plane 1 (plane layer: these items are gaps in the copper):
  lines w10: 79,-1791.83 672,-1791.83 672,-1294.83 357,-979.83 284,-979.83 79,-1184.83 79,-1791.83

## Silkscreen, mask and mechanical layers (free items; w line width, h text height)
Bottom Overlay:
  lines w39.37: 1355,-1434 1678,-1434 ; 1509,-1278 1509,-1600 1510,-1600

## Text inside footprints (layer, text, board x,y; h text height)
R12: Mechanical 1 "R1" at 66.09,-1453.84 h11.81 r90
R33: Mechanical 1 "R1" at 229.16,-1191.09 h11.81
U3: Bottom Overlay "*" at 1275.67,-439.53 h40
U5: Mechanical 15 "1" at 960.53,-1005.71 h29.53